# EAGLE board currlim (EAGLE 5.11)
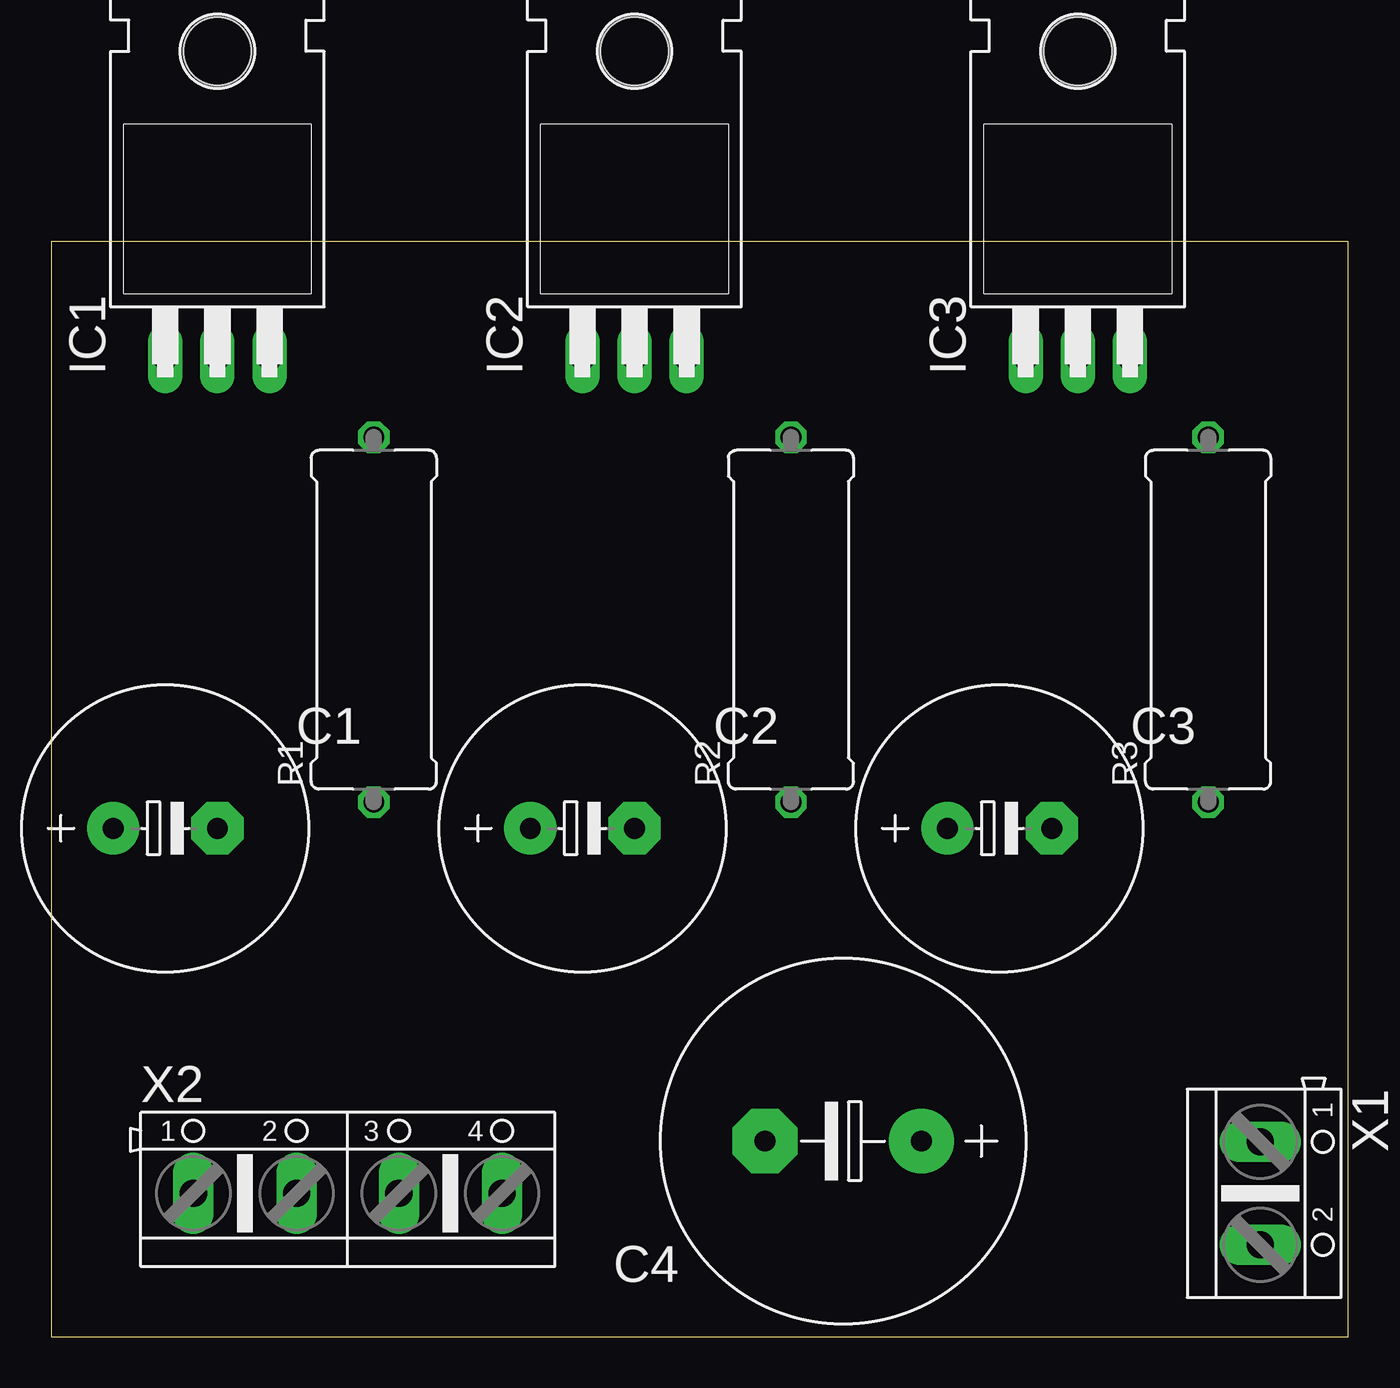
[diagram p0: board, top side]
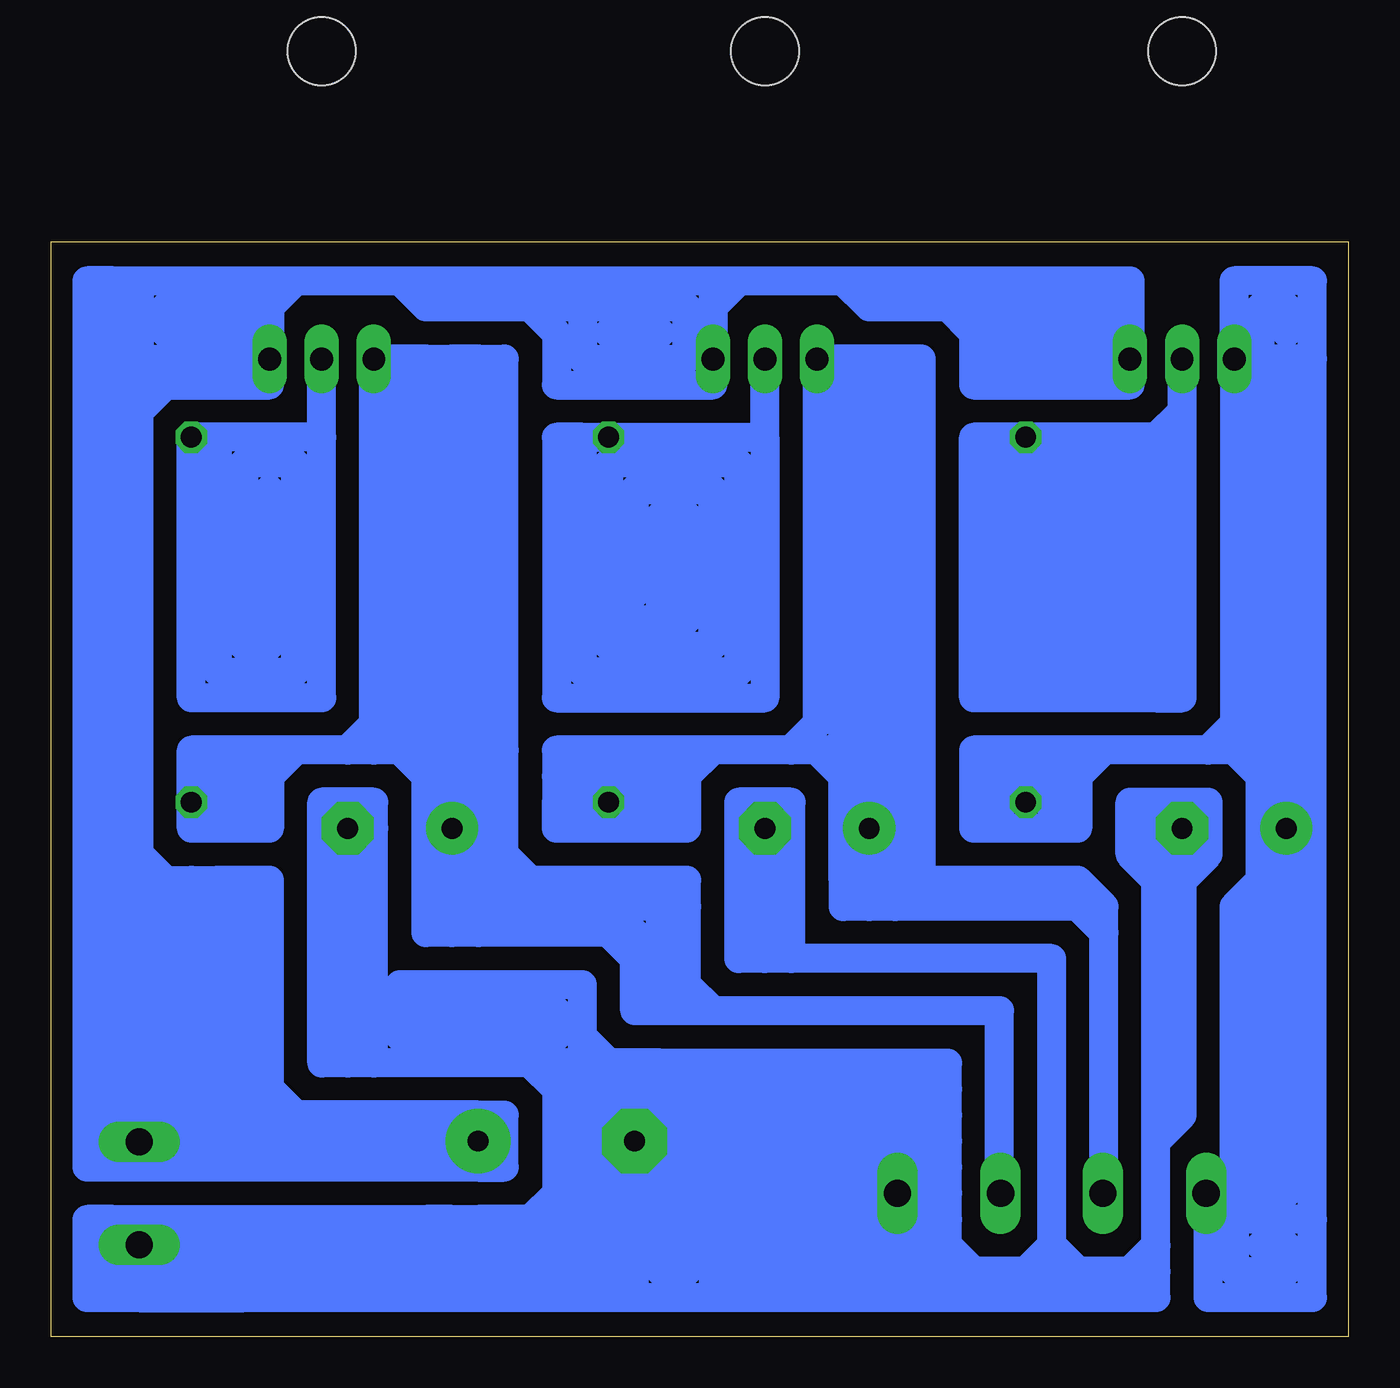
[diagram p1: board, bottom side, seen from below]

Size 63.17 x 53.33 mm. Coordinates in mm from the lower left corner, seen from the top.
Outline: 0,0 63.17,0 63.17,53.33 0,53.33 0,0
Copper layers (1*16): Top 0.035mm / dielectric 1.5mm / Bottom 0.035mm
Design rules "default": minimum track width 10mil, minimum drill 24mil, track to track 8mil, track to pad 8mil, pad to pad 8mil, via to via 8mil, smd to smd 8mil, copper to edge 40mil, drill to drill 8mil, minimum pad ring 10mil, minimum via ring 8mil, stop-mask expansion 4mil, vias tented up to drill 0mil, thermal gap 10mil

## Footprints (pad centres in the part's own frame; a part is rotated, then mirrored left to right if it is on the bottom)
E5-13 = drill 1.016 pad 2.54 round: + -2.54,0 | drill 1.016 pad 2.54 octagon: - 2.54,0
E7,5-18 = drill 1.016 pad 3.15 round: + -3.81,0 | drill 1.016 pad 3.15 octagon: - 3.81,0
TO220H = drill 1.118 long: 1 -2.54,-10.16; 2 0,-10.16; 3 2.54,-10.16 | hole 3.302: 0,4.826
0617/17 = drill 1.016 octagon: 1 -8.89,0; 2 8.89,0
AK500/2 = drill 1.321 long: 1 -2.515,0; 2 2.515,0
AK500/4 = drill 1.321 long: 1 -7.518,0; 2 -2.489,0; 3 2.489,0; 4 7.518,0

## Placement (x,y rotation side)
C1  [E5-13]  5.55,24.76 0 top
C2  [E5-13]  25.87,24.76 0 top
C3  [E5-13]  46.19,24.76 0 top
C4  [E7,5-18]  38.57,9.52 180 top
IC1  317T  [TO220H]  8.09,57.78 0 top
IC2  317T  [TO220H]  28.41,57.78 0 top
IC3  317T  [TO220H]  50,57.78 0 top
R1  [0617/17]  15.71,34.92 90 top
R2  [0617/17]  36.03,34.92 90 top
R3  [0617/17]  56.35,34.92 90 top
X1  [AK500/2]  58.89,6.98 270 top
X2  [AK500/4]  14.44,6.98 0 top

## Library data of the parts
C1-C4 R1-R3 = rcl
IC1-IC3 = linear
X1 X2 = con-ptr500

## Nets
N$2: IC1.2 R1.2
N$3: C1.+ IC1.1 R1.1 X2.1
N$4: IC2.2 R2.2
N$5: IC3.2 R3.2
N$6: C2.+ IC2.1 R2.1 X2.2
N$7: C3.+ IC3.1 R3.1 X2.3
N$10: C1.- C2.- C3.- C4.- X1.2 X2.4
N$11: C4.+ IC1.3 IC2.3 IC3.3 X1.1

## Tracks (layer width: path | path; a pad name or v marks a point on that pad's centre or on a via)
N$2
  Bottom 1.422: 8.09,45.08 IC1.2 | 8.09,43.81 8.09,45.08 | 9.36,43.81 8.09,43.81 | 9.36,43.81 10.63,43.81 | 8.09,43.81 8.09,31.11 9.36,31.11 | 16.98,31.11 18.25,31.11 18.25,43.81 16.98,43.81 | 9.36,43.81 8.09,45.08 | 9.36,31.11 9.36,43.81 | 9.36,31.11 10.63,31.11 | 15.71,31.11 16.98,31.11 | 16.98,31.11 16.98,43.81 | R1.2 16.98,43.81 | 10.63,43.81 11.9,43.81 | 10.63,31.11 10.63,43.81 | 10.63,31.11 11.9,31.11 | 13.17,31.11 14.44,31.11 | 14.44,31.11 15.71,31.11 | 15.71,31.11 R1.2 | 14.44,43.81 R1.2 | 11.9,43.81 13.17,43.81 | 11.9,31.11 11.9,43.81 | 11.9,31.11 13.17,31.11 | 13.17,31.11 13.17,43.81 | 13.17,43.81 14.44,43.81 | 14.44,31.11 14.44,43.81
N$3
  Bottom 1.422: 4.28,47.62 3.01,47.62 3.01,28.57 | 4.28,47.62 IC1.1 | 3.01,28.57 C1.+ 3.01,6.98 5.55,6.98 | R1.1 15.71,28.57 14.44,28.57 | 3.01,28.57 5.55,28.57 | 5.55,28.57 6.82,28.57 | 6.82,28.57 11.9,28.57 | 11.9,28.57 13.17,28.57 | 13.17,28.57 14.44,28.57 | 6.82,6.98 5.55,6.98 | 6.82,6.98 X2.1 | 6.82,6.98 6.82,5.71 5.55,5.71 | 4.28,5.71 5.55,5.71 | 1.74,5.71 4.28,5.71 | 1.74,5.71 1.74,47.62 | 4.28,47.62 4.28,27.3 | 4.28,22.22 4.28,27.3 | 4.28,5.71 4.28,22.22 | IC1.1 5.55,29.84 | 5.55,29.84 5.55,28.57 | 5.55,6.98 5.55,20.95 4.28,22.22 | 4.28,27.3 5.55,28.57 | 13.17,28.57 13.17,27.3 | 13.17,27.3 13.17,24.76 14.44,24.76 | 16.98,24.76 18.25,24.76 18.25,28.57 16.98,28.57 | 14.44,28.57 16.98,28.57 | 14.44,28.57 14.44,24.76 | 14.44,24.76 16.98,24.76 | 16.98,28.57 16.98,24.76 | 6.82,6.98 6.82,1.9 1.74,1.9 1.74,5.71 | 1.74,5.71 5.55,5.71 | 5.55,5.71 5.55,3.17 3.01,3.17 3.01,4.44 4.28,4.44 | 5.55,29.84 6.82,28.57 | IC1.1 5.55,51.43 1.74,51.43 1.74,47.62 | 1.74,47.62 4.28,47.62 | 4.28,47.62 4.28,50.16 3.01,50.16 3.01,48.89 | 11.9,28.57 13.17,27.3
N$4
  Bottom 1.422: 28.41,43.81 IC2.2 | 28.41,43.81 R2.2 37.3,43.81 | 28.41,43.81 28.41,31.11 38.57,31.11 38.57,43.81 37.3,43.81 | 37.3,43.81 37.3,32.38 29.68,32.38 29.68,42.54 36.03,42.54 36.03,34.92 | 36.03,34.92 36.03,33.65 30.95,33.65 30.95,41.27 34.76,41.27 34.76,36.19 36.03,34.92 | 36.03,34.92 33.49,34.92 | 33.49,34.92 32.22,34.92 32.22,40 33.49,40 33.49,34.92
N$5
  Bottom 1.422: 50,43.81 IC3.2 | 55.08,43.81 R3.2 56.35,31.11 50,31.11 50,43.81 | 50,43.81 55.08,43.81 | 55.08,43.81 55.08,32.38 51.27,32.38 51.27,42.54 53.81,42.54 53.81,33.65 52.54,33.65 52.54,41.27
N$6
  Bottom 1.422: 24.6,47.62 23.33,47.62 23.33,28.57 | 23.33,28.57 C2.+ 23.33,20.95 | 36.03,27.3 36.03,28.57 33.49,28.57 | 23.33,28.57 24.6,28.57 | 24.6,28.57 25.87,28.57 | 25.87,28.57 27.14,28.57 | 27.14,28.57 30.95,28.57 | 30.95,28.57 32.22,28.57 | 32.22,28.57 33.49,28.57 | X2.2 11.9,6.98 11.9,19.68 | 22.06,20.95 23.33,20.95 | 13.17,20.95 22.06,20.95 | 11.9,20.95 13.17,20.95 | 11.9,19.68 11.9,20.95 | 23.33,20.95 24.6,22.22 | 24.6,22.22 24.6,27.3 | 24.6,27.3 24.6,28.57 | 22.06,28.57 24.6,28.57 | 22.06,22.22 22.06,28.57 | 22.06,20.95 22.06,22.22 | 24.6,22.22 24.6,20.95 23.33,20.95 | 33.49,26.03 R2.1 | 33.49,27.3 33.49,26.03 | 33.49,28.57 33.49,27.3 | 33.49,28.57 38.57,28.57 38.57,27.3 | 38.57,27.3 38.57,26.03 | R2.1 38.57,26.03 | 36.03,27.3 R2.1 | 38.57,27.3 36.03,27.3 | 33.49,27.3 38.57,27.3 | 33.49,24.76 33.49,26.03 | 33.49,24.76 38.57,24.76 38.57,26.03 | 33.49,24.76 32.22,24.76 32.22,27.3 | 32.22,28.57 32.22,27.3 | 13.17,20.95 13.17,22.22 | 11.9,20.95 13.17,22.22 | 13.17,22.22 20.79,22.22 | 20.79,22.22 22.06,22.22 | 20.79,22.22 20.79,28.57 | 22.06,28.57 20.79,28.57 | 20.79,28.57 20.79,47.62 22.06,47.62 | 24.6,47.62 IC2.1 25.87,29.84 27.14,28.57 | 22.06,47.62 24.6,47.62 | 22.06,28.57 22.06,47.62 | 24.6,28.57 24.6,47.62 | 11.9,19.68 13.17,20.95 | 24.6,27.3 25.87,28.57 | 30.95,28.57 32.22,27.3
N$7
  Bottom 1.422: 44.92,47.62 43.65,47.62 | 46.19,47.62 IC3.1 47.46,29.84 | 43.65,28.57 C3.+ 43.65,19.68 42.38,19.68 | 43.65,28.57 43.65,47.62 | 56.35,28.57 R3.1 55.08,26.03 | 43.65,28.57 44.92,28.57 | 44.92,28.57 46.19,28.57 | 47.46,28.57 48.73,28.57 | 48.73,28.57 51.27,28.57 | 51.27,28.57 52.54,28.57 | 52.54,28.57 53.81,28.57 | 55.08,28.57 56.35,28.57 | 36.03,19.68 42.38,19.68 | 36.03,19.68 34.76,19.68 34.76,18.41 | 34.76,18.41 34.76,15.87 33.49,15.87 | X2.3 16.98,6.98 16.98,15.87 30.95,15.87 | 30.95,15.87 32.22,15.87 | 44.92,27.3 44.92,28.57 | 44.92,27.3 44.92,19.68 42.38,19.68 | 42.38,20.95 42.38,19.68 | 42.38,20.95 42.38,22.22 | 42.38,22.22 42.38,28.57 | 36.03,20.95 42.38,20.95 | 36.03,20.95 33.49,20.95 33.49,15.87 | 32.22,15.87 33.49,15.87 | 32.22,15.87 32.22,17.14 | 32.22,17.14 32.22,20.95 | 32.22,20.95 36.03,20.95 | 53.81,26.03 55.08,26.03 | 53.81,28.57 53.81,26.03 | 53.81,28.57 55.08,28.57 | 55.08,28.57 55.08,26.03 | 53.81,26.03 53.81,24.76 | 53.81,24.76 56.35,24.76 56.35,28.57 | 32.22,20.95 32.22,22.22 39.84,22.22 | 39.84,22.22 41.11,22.22 | 42.38,22.22 41.11,22.22 | 41.11,22.22 41.11,23.49 | 41.11,23.49 41.11,28.57 | 41.11,28.57 42.38,28.57 | 42.38,28.57 43.65,28.57 | 53.81,24.76 52.54,24.76 52.54,27.3 | 52.54,28.57 52.54,27.3 | 41.11,28.57 41.11,47.62 42.38,47.62 | 42.38,47.62 43.65,47.62 | 42.38,28.57 42.38,47.62 | 42.38,28.57 44.92,28.57 | 44.92,28.57 44.92,47.62 | 44.92,47.62 46.19,47.62 | 46.19,28.57 46.19,47.62 | 46.19,28.57 47.46,28.57 | 47.46,28.57 47.46,29.84 | 39.84,22.22 41.11,23.49 | 30.95,15.87 32.22,17.14 | 44.92,27.3 46.19,28.57 | 51.27,28.57 52.54,27.3 | 48.73,28.57 47.46,29.84 | 34.76,18.41 36.03,19.68
N$10
  Bottom 1.422: 9.36,26.03 6.82,26.03 6.82,23.49 | 39.84,3.17 37.3,6.98 | 39.84,3.17 41.11,3.17 38.57,5.71 | 39.84,5.71 42.38,5.71 42.38,3.17 43.65,3.17 43.65,5.71 44.92,5.71 44.92,3.17 46.19,3.17 46.19,5.71 47.46,5.71 47.46,3.17 48.73,3.17 48.73,5.71 50,5.71 50,3.17 51.27,3.17 51.27,5.71 53.81,5.71 53.81,1.9 58.89,1.9 | 58.89,1.9 58.89,3.17 | 58.89,4.44 58.89,5.71 | 27.14,18.41 14.44,18.41 14.44,4.44 | 27.14,18.41 28.41,18.41 C2.- 28.41,26.03 29.68,26.03 | 14.44,1.9 14.44,4.44 | X2.4 22.06,6.98 22.06,1.9 | 14.44,1.9 19.52,1.9 | 19.52,1.9 22.06,1.9 | 34.76,1.9 34.76,3.17 | 34.76,3.17 C4.- | 22.06,1.9 30.95,1.9 | 30.95,1.9 34.76,1.9 | 52.54,4.44 52.54,1.9 36.03,1.9 | 52.54,4.44 X1.2 | 34.76,1.9 36.03,1.9 | C1.- 9.36,24.76 9.36,23.49 | 14.44,1.9 9.36,1.9 9.36,3.17 | 48.73,15.87 C3.- | 33.49,13.33 32.22,13.33 | 47.46,13.33 48.73,15.87 | 30.95,3.17 30.95,1.9 | 30.95,3.17 30.95,4.44 | 30.95,5.71 30.95,6.98 | 30.95,8.25 30.95,9.52 | 30.95,10.79 30.95,12.06 | 32.22,13.33 30.95,13.33 | 19.52,1.9 19.52,3.17 | 19.52,4.44 19.52,5.71 | 19.52,6.98 19.52,8.25 | 19.52,9.52 19.52,10.79 | 19.52,12.06 19.52,13.33 30.95,13.33 | 30.95,13.33 30.95,12.06 | 19.52,12.06 30.95,12.06 | 19.52,10.79 19.52,12.06 | 19.52,10.79 30.95,10.79 | 30.95,9.52 30.95,10.79 | 19.52,9.52 30.95,9.52 | 19.52,8.25 19.52,9.52 | 19.52,8.25 30.95,8.25 | 30.95,6.98 30.95,8.25 | 19.52,6.98 30.95,6.98 | 19.52,5.71 19.52,6.98 | 19.52,5.71 30.95,5.71 | 30.95,4.44 30.95,5.71 | 19.52,4.44 30.95,4.44 | 19.52,3.17 19.52,4.44 | 19.52,3.17 30.95,3.17 | 9.36,3.17 10.63,3.17 | 10.63,3.17 13.17,3.17 | 13.17,3.17 15.71,3.17 | 15.71,3.17 18.25,3.17 | 19.52,3.17 18.25,3.17 | 32.22,13.33 32.22,3.17 33.49,3.17 33.49,13.33 | 34.76,13.33 33.49,13.33
  Bottom 1.422: 34.76,3.17 34.76,13.33 | 34.76,3.17 36.03,3.17 | 36.03,3.17 36.03,13.33 | 37.3,13.33 37.3,12.06 | 37.3,12.06 37.3,9.52 | 37.3,6.98 37.3,9.52 | 37.3,6.98 37.3,3.17 38.57,3.17 38.57,4.44 | 38.57,4.44 38.57,5.71 | 37.3,6.98 38.57,5.71 | 37.3,6.98 37.3,12.06 | 47.46,13.33 48.73,14.6 48.73,13.33 | 47.46,13.33 48.73,13.33 | 37.3,12.06 38.57,13.33 | 38.57,5.71 39.84,5.71 | 58.89,5.71 39.84,5.71 | 36.03,1.9 58.89,1.9 | 36.03,1.9 36.03,3.17 | 36.03,3.17 39.84,3.17 | 39.84,3.17 58.89,3.17 | 58.89,3.17 58.89,4.44 | 52.54,4.44 58.89,4.44 | 52.54,4.44 38.57,4.44 | 33.49,13.33 36.03,13.33 | 38.57,13.33 39.84,13.33 | 39.84,13.33 47.46,13.33 | 34.76,13.33 36.03,13.33 | 36.03,13.33 37.3,13.33 | 37.3,13.33 38.57,13.33 | 48.73,15.87 48.73,13.33 | 38.57,13.33 37.3,9.52 | 38.57,5.71 37.3,9.52 | 47.46,24.76 C3.- | 47.46,13.33 47.46,24.76 | C3.- 50,24.76 50,23.49 | 50,23.49 50,13.33 48.73,13.33 | 47.46,24.76 47.46,26.03 50,26.03 50,23.49 | 37.3,13.33 37.3,14.6 | 37.3,14.6 37.3,17.14 46.19,17.14 46.19,15.87 | 46.19,15.87 46.19,14.6 38.57,14.6 38.57,15.87 46.19,15.87 | 29.68,26.03 29.68,18.41 27.14,18.41 | 27.14,18.41 27.14,26.03 29.68,26.03 | 9.36,23.49 9.36,26.03 | 9.36,3.17 9.36,4.44 | 9.36,4.44 9.36,9.52 | 9.36,9.52 9.36,22.22 | 9.36,22.22 9.36,23.49 | 9.36,23.49 8.09,23.49 | 8.09,23.49 6.82,23.49 | 9.36,23.49 10.63,23.49 | 10.63,23.49 10.63,26.03 9.36,26.03 | 8.09,22.22 8.09,23.49 | 8.09,22.22 8.09,10.79 9.36,9.52 | 60.16,5.71 58.89,5.71 | 60.16,5.71 61.43,5.71 61.43,1.9 60.16,1.9 | 58.89,1.9 60.16,1.9 | 60.16,1.9 60.16,5.71 | 36.03,13.33 37.3,14.6 | 8.09,22.22 6.82,23.49 | 9.36,22.22 10.63,23.49 | 10.63,3.17 9.36,4.44 | 14.44,4.44 13.17,3.17 | 14.44,4.44 15.71,3.17 | 18.25,3.17 19.52,4.44
  Bottom 1.422: 39.84,13.33 38.57,12.06 38.57,6.98 39.84,5.71
N$11
  Bottom 1.422: 30.95,46.35 38.57,46.35 38.57,48.89 39.84,50.16 | 39.84,50.16 44.92,50.16 46.19,51.43 | C4.+ 42.38,9.5 X1.1 52.54,9.52 58.89,9.52 58.89,10.79 | 58.89,10.79 58.89,23.49 | 58.89,23.49 58.89,43.81 | 58.89,43.81 58.89,46.35 | 58.89,47.62 58.89,46.35 | 52.54,51.43 52.54,50.16 | 52.54,51.43 51.27,51.43 | 51.27,51.43 46.19,51.43 | 46.19,51.43 30.95,51.43 | 30.95,50.16 IC2.3 | 30.95,51.43 30.95,50.16 | 30.95,51.43 29.68,51.43 | 29.68,51.43 24.6,51.43 | 24.6,51.43 19.52,51.43 | 19.52,51.43 10.63,51.43 10.63,50.16 | 10.63,48.89 IC1.3 | C4.+ 42.38,10.79 | 42.38,10.79 51.27,10.79 | 51.27,10.79 52.54,10.79 | 53.81,10.79 55.08,10.79 | 57.62,10.79 56.35,10.79 | 58.89,10.79 57.62,10.79 | 58.89,8.25 58.89,10.79 | 42.38,8.25 58.89,8.25 | C4.+ 42.38,8.25 | 42.38,10.79 41.11,10.79 41.11,8.25 42.38,8.25 | 57.62,10.79 57.62,22.22 | 56.35,22.22 55.08,22.22 | 53.81,22.22 52.54,22.22 52.54,12.06 | 52.54,10.79 52.54,12.06 | 52.54,10.79 53.81,10.79 | 53.81,10.79 53.81,22.22 | 53.81,22.22 55.08,22.22 | 55.08,10.79 55.08,22.22 | 55.08,10.79 56.35,10.79 | 56.35,10.79 56.35,22.22 | 57.62,22.22 56.35,22.22 | 58.89,23.49 57.62,22.22 | 57.62,46.35 52.54,46.35 | 58.89,46.35 57.62,46.35 | 39.84,50.16 37.3,50.16 | 37.3,50.16 32.22,50.16 32.22,47.62 37.3,47.62 37.3,50.16 | 37.3,50.16 34.76,50.16 33.49,48.89 36.03,48.89 | 52.54,50.16 51.27,51.43 | 30.95,50.16 29.68,51.43 | 24.6,51.43 23.33,50.16 19.52,50.16 18.25,48.89 | 18.25,47.62 18.25,46.35 10.63,46.35 IC1.3 | 18.25,47.62 IC1.3 | 18.25,48.89 18.25,47.62 | 18.25,50.16 18.25,48.89 | 19.52,51.43 18.25,50.16 | 18.25,50.16 10.63,50.16 | 10.63,50.16 10.63,48.89 | 18.25,48.89 10.63,48.89 | 58.89,51.43 52.54,51.43 | 58.89,51.43 58.89,47.62
  Bottom 1.422: 58.89,47.62 IC3.3 52.54,48.89 | 52.54,50.16 52.54,48.89 | 52.54,50.16 57.62,50.16 57.62,48.89 52.54,48.89 | 58.89,8.25 60.16,8.25 | 60.16,51.43 58.89,51.43 | 60.16,8.25 60.16,51.43 | 60.16,51.43 61.43,51.43 61.43,8.25 60.16,8.25 | 58.89,43.81 58.89,45.08 57.62,46.35 | 51.27,10.79 52.54,12.06